# Altium PCB AccBottom.PcbDoc
Units mil, origin at the board's own origin, x right, y up, seen from the top; angles counter-clockwise.
Board outline 12801.24 x 5462.41 mil, 2 copper layers (Top Layer, Bottom Layer), stack 42.17 mil thick; 35 components, 30 nets, 122 pads, 29 vias.
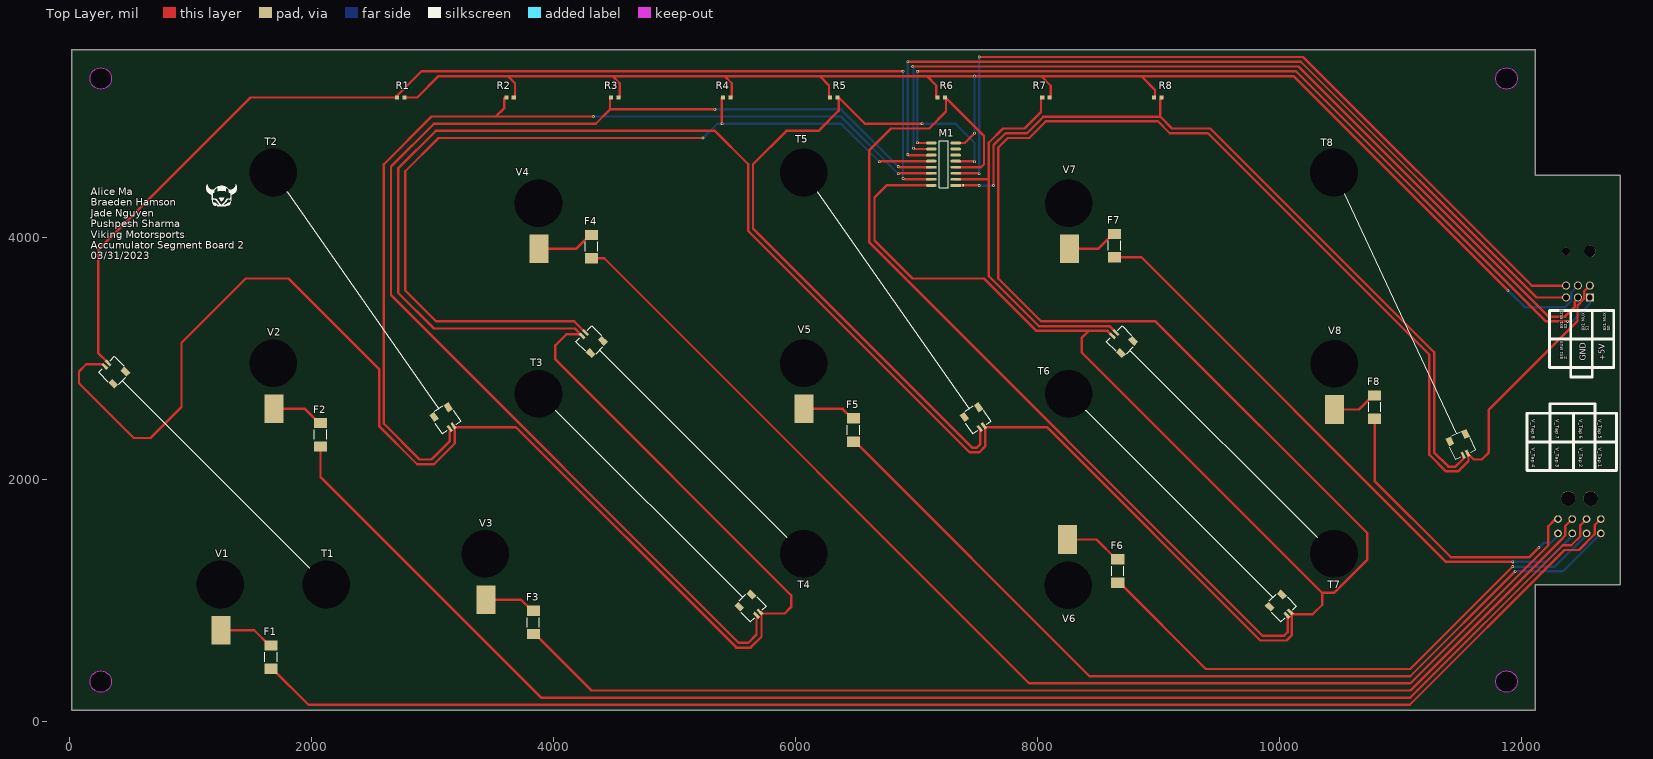
[diagram p0: Top Layer view]
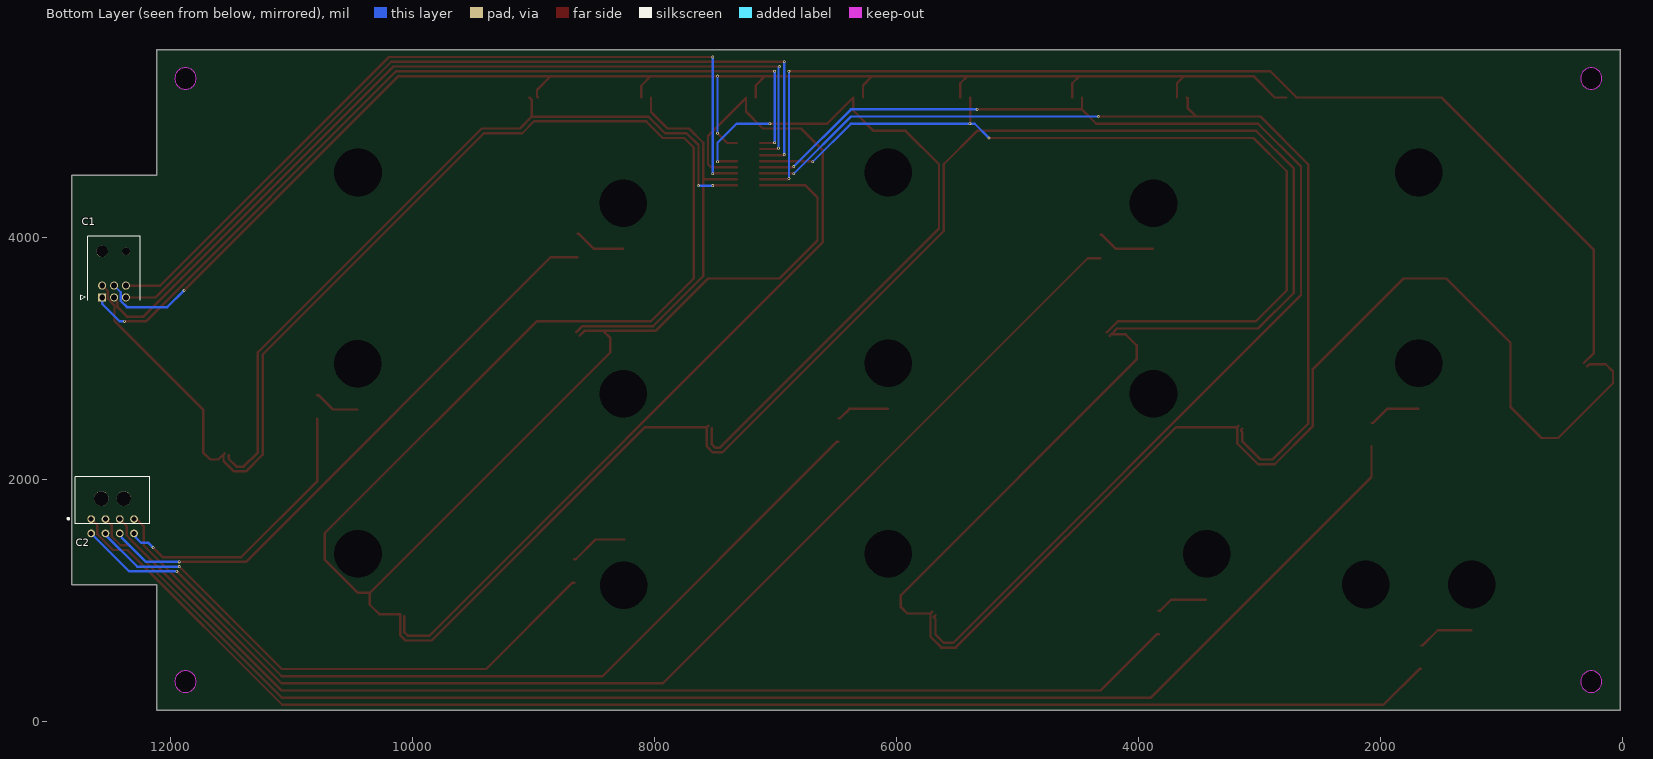
[diagram p1: Bottom Layer view, seen from below]
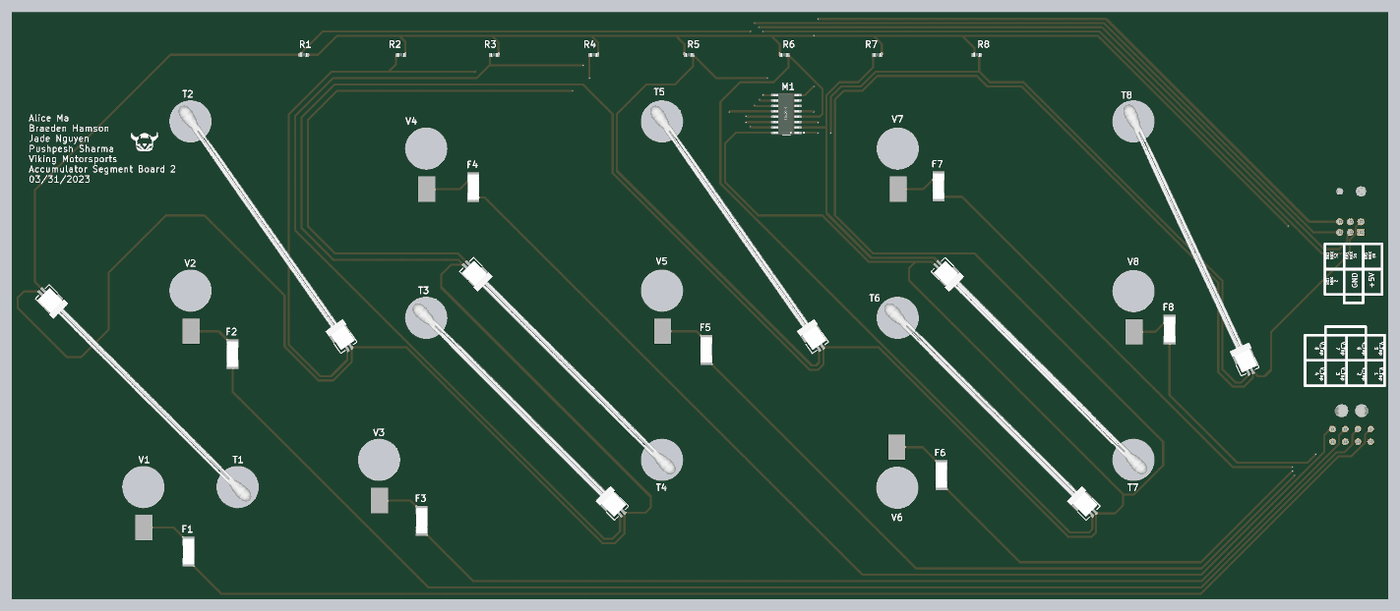
[diagram p2: 3D render of the assembled board from above, using the file's embedded part models]

## Layer stack, top to bottom
Top Solder: solder mask 0.4, Solder Resist, Dk 3.5
Top Layer: signal copper 1.4
Dielectric 1: dielectric 39.3701, FR-4, Dk 4.8
Bottom Layer: signal copper 1.4
Bottom Solder: solder mask 0.4, Solder Resist, Dk 3.5

## Board outline
12116.22,4515.75 12818.9,4515.75 12818.9,1129.92 12116.22,1129.92 12116.22,90.55 17.92,90.55 17.88,1043.31 17.66,1043.31 17.66,4507.87 17.71,4507.87 17.66,5552.69 17.93,5552.96 12115.96,5552.96 12116.22,5552.69
cut-out: 11878.24,5226.24 cw(c11878.24,5314.74) 11789.74,5314.74 cw(c11878.24,5314.74) 11878.24,5403.24 cw(c11878.24,5314.74) 11966.74,5314.74 cw(c11878.24,5314.74)
cut-out: 11878.24,241.12 cw(c11878.24,329.62) 11789.74,329.62 cw(c11878.24,329.62) 11878.24,418.12 cw(c11878.24,329.62) 11966.74,329.62 cw(c11878.24,329.62)
cut-out: 257.85,241.12 cw(c257.85,329.62) 169.35,329.62 cw(c257.85,329.62) 257.85,418.12 cw(c257.85,329.62) 346.35,329.62 cw(c257.85,329.62)
cut-out: 257.85,5226.24 cw(c257.85,5314.74) 169.35,5314.74 cw(c257.85,5314.74) 257.85,5403.24 cw(c257.85,5314.74) 346.35,5314.74 cw(c257.85,5314.74)

## Design rules (kind name [scope] priority, off if disabled: settings)
Clearance [All] p1: gap=0.32 ignorepadtopadclearanceinfootprint=FALSE
PolygonConnect [All] p1: connectstyle=Relief reliefconductorwidth=10 reliefentries=4 polygonreliefangle="90 Angle" airgapwidth=10
RoutingVias [All] p1: holewidth=11.81 width=23.62 viastyle="Through Hole" minholewidth=11.81 minwidth=23.62 maxholewidth=11.81 maxwidth=23.62
SolderMaskExpansion [All] p1: expansion=4 istentingtop=FALSE
Width [All] p1: maxlimit=30 minlimit=10 preferedwidth=19.68
30 further rules are at their usual default settings.

## Components (designator, comment, footprint, x,y, rotation, side; value= is the part's Value field where it differs from the comment)
C1 "1053141106" "6 Pin Dual Nano" 12566.93,3504.72 r0 bottom
C2 "0430450800" "8 Pin Dual" 12480.32,1842.52 r0 bottom
F1 "0ACG-1000-TE" Fuse 1665.35,531.5 r90 top
F2 "0ACG-1000-TE" Fuse 2074.8,2370.08 r90 top
F3 "0ACG-1000-TE" Fuse 3834.65,818.9 r90 top
F4 "0ACG-1000-TE" Fuse 4314.96,3925.2 r90 top
F5 "0ACG-1000-TE" Fuse 6480.31,2409.45 r90 top
F6 "0ACG-1000-TE" Fuse 8665.35,1244.09 r90 top
F7 "0ACG-1000-TE" Fuse 8637.8,3933.07 r90 top
F8 "0ACG-1000-TE" Fuse 10787.4,2598.43 r90 top
M1 "74HC4051D,653" 8x1MUX 7224.41,4606.3 r180 top
R1 "RC0805FR-133K3L" 3.3kRes 2737.22,5157.48 r0 top value=3.3kR
R2 "RC0805FR-133K3L" 3.3kRes 3641.73,5157.48 r0 top value=3.3kR
R3 "RC0805FR-133K3L" 3.3kRes 4507.87,5157.48 r0 top value=3.3kR
R4 "RC0805FR-133K3L" 3.3kRes 5433.07,5157.48 r0 top value=3.3kR
R5 "RC0805FR-133K3L" 3.3kRes 6317.89,5157.48 r180 top value=3.3kR
R6 "RC0805FR-133K3L" 3.3kRes 7204.72,5157.48 r180 top value=3.3kR
R7 "RC0805FR-133K3L" 3.3kRes 8070.87,5157.48 r0 top value=3.3kR
R8 "RC0805FR-133K3L" 3.3kRes 8996.06,5157.48 r180 top value=3.3kR
T1 "Thermistor" Thermistor 320.01,2962.69 r45 top
T2 "Thermistor" Thermistor 3141.52,2421.46 r215 top
T3 "Thermistor" Thermistor 5678.68,877.72 r225 top
T4 "Thermistor" Thermistor 4265.48,3215.8 r45 top
T5 "Thermistor" Thermistor 7525.38,2421.46 r215 top
T6 "Thermistor" Thermistor 10062.54,877.72 r225 top
T7 "Thermistor" Thermistor 8649.34,3215.8 r45 top
T8 "Thermistor" Thermistor 11519.73,2200.54 r205 top
V1 "V_Tap" "Voltage tap" 1245.8,1132.29 r0 top
V2 "V_Tap" "Voltage tap" 1684.19,2961.23 r0 top
V3 "V_Tap" "Voltage tap" 3437.73,1385.39 r0 top
V4 "V_Tap" "Voltage tap" 3876.12,4283.96 r0 top
V5 "V_Tap" "Voltage tap" 6068.05,2961.23 r0 top
V6 "V_Tap" "Voltage tap" 8255.91,1125.98 r180 top
V7 "V_Tap" "Voltage tap" 8259.97,4283.96 r0 top
V8 "V_Tap" "Voltage tap" 10452.76,2956.69 r0 top

## Footprints (in the part's own frame and the unit in brackets; to place one, negate y for a bottom-side part, rotate by r counter-clockwise, add the part's x,y. Pads: shape width x height; smd on the part's side, far side on the other; paste and mask are expansions set on the pad)
3.3kRes [mm]
  rect 0.87x0.93 smd: 1(-0.78,0) 2(0.78,0)
  body extent -0.8,-0.4 0.8,0.4, height 0.55
"6 Pin Dual Nano" [mm]
  rect 1.7x1.7 / inner round 1.7 / far side rect 1.7x1.7 hole 1.2 mask+0.076: 1(0,0)
  round 1.7 hole 1.2 mask+0.076: 2(-2.5,0) 3(-5,0) 4(0,-2.5) 5(-2.5,-2.5) 6(-5,-2.5)
  round 1.6 hole 1.6 unplated mask+0.076: 7(-5,-9.68)
  round 2.37 hole 2.37 unplated mask+0.076: 8(0,-9.68)
  silkscreen extent -7.97,-12.89 4.5,0.59, body extent -6.55,-14.34 1.89,0.32, height 9.23
"8 Pin Dual" [mm]
  round 1.62 hole 1.07: 1(4.5,4.32) 2(1.5,4.32) 3(-1.5,4.32) 4(-4.5,4.32) 5(4.5,7.32) 6(1.5,7.32) 7(-1.5,7.32) 8(-4.5,7.32)
  round 3.05 hole 3.05 unplated: 9(-2.35,0) 10(2.35,0)
  silkscreen extent -7.83,-4.6 9.47,5.31, body extent -8.08,-4.56 8.08,7.68, height 8.74
8x1MUX [mil]
  rect 86.79x23.94 smd paste+0 mask+0: 1(-100.43,175)
  rrect100% 86.79x23.94 smd paste+0 mask+0: 2(-100.43,125) 3(-100.43,75) 4(-100.43,25) 5(-100.43,-25) 6(-100.43,-75) 7(-100.43,-125) 8(-100.43,-175) 9(100.43,-175) 10(100.43,-125) 11(100.43,-75) 12(100.43,-25) 13(100.43,25) 14(100.43,75) 15(100.43,125) 16(100.43,175)
  silkscreen extent -168,-195 37,195, body extent -164,-215 164,215, height 10
Fuse [mm]
  rect 2.15x2.8 smd: 1(-2.455,0) 2(2.455,0)
  silkscreen extent -1,-1.27 1,1.27, body extent -3.05,-1.39 3.05,1.4, height 2.55
Thermistor [mm]
  rect 0.6x1.55 smd: 1(-1,0) 2(0,0)
  rect 1.2x1.8 smd: ""(-2.325,-3.825) ""(1.3,-3.825)
  oval 0.6x1.2 hole 10 unplated: ""(-0.5,-65.25)
  silkscreen extent -2.8,-60.32 1.9,0.08, body extent -3.12,-69.41 1.88,0.18, height 1.24
"Voltage tap" [mm]
  rect 4x6 smd: 1(0.125,-9.6)
  round 3 hole 10 unplated: ""(0,0)

## Part data
C1: "Nano-Fit Right-Angle Header, Through Hole, 2.50mm Pitch, Dual Row, 6 Circuits, Glow-Wire Capable, Tray", Manufacturer_Name=Molex, Arrow Part Number=1053141106, Arrow Price/Stock=https://www.arrow.com/en/products/1053141106/molex?region=europe, Datasheet Link=https://www.molex.com/pdm_docs/sd/1053141104_sd.pdf, Geometry.Height=9.14mm, Manufacturer_Part_Number=1053141106
C2: "Micro-Fit (3.0) dual row, right angle, thru hole header", Manufacturer_Name=Molex, Mouser Part Number=N/A, Arrow Part Number=0430450800, Arrow Price/Stock=https://www.arrow.com/en/products/0430450800/molex, Datasheet Link=http://www.molex.com/pdm_docs/sd/430450800_sd.pdf, Manufacturer_Part_Number=0430450800, Mouser Price/Stock=https://www.mouser.co.uk/ProductDetail/Molex/0430450800?qs=PBcRNPEHKsoGHBzIT0cB6w%3D%3D
F1 F2 F3 F4 F5 F6 F7 F8: "Electric Fuse, 1A, 350VAC, 500VDC, 100A (IR), Surface Mount", Manufacturer=Bel, Supplier Part Number=71AJ7068, Category=Fuses, Manufacturer Part Number=0ACG-1000-TE, Pricing="1=3.46000, 10=3.34000, 25=2.98000, 50=2.62000, 100=2.14000, 250=2.08000 (USD)", RoHS=Yes, Stock=965, Supplier=Newark
M1: library part 74HC4051D, "IC MUX/DEMUX 8X1 16SOIC"
R1 R2 R3 R4 R5 R6 R7 R8: "Fixed Resistor, Metal Glaze/thick Film, 0.125W, 3300ohm, 150V, 1% +/-Tol, 100ppm/Cel, Surface Mount, 0805", Case Code (Imperial)=0805, Case Code (Metric)=2012, Manufacturer="KOA Speer", Manufacturer Part Number=RK73G2ATTD3301F, Max Operating Temperature=125°C, Min Operating Temperature=-55°C, Package Height=0.5mm, Package Length=2mm, Package Shape=Rectangular, Package Style=SMTMeter, Package Width=1.25mm, Power=125mW, Rated Temperature=70°C, Resistance=3.3kR, Resistor Type="Thick Film", Supplier Part Number 1=3067720, Temperature Coefficient=50ppm/°C, Tolerance=1%, Voltage Rating=150V, Additional Feature="HIGH PRECISION", Case/Package=0805, Category="Chip SMD Resistors", ComponentLink1Description=https://datasheet.ciiva.com:443/pdfs/VipMasterIC/IC/KOAS/KOAS-S-A0009827357/KOAS-S-A0009827357-1.pdf?src-supplier=IHS+Markit, ComponentLink1URL=https://datasheet.ciiva.com:443/pdfs/VipMasterIC/IC/KOAS/KOAS-S-A0009827357/KOAS-S-A0009827357-1.pdf?src-supplier=IHS+Markit, ComponentLink2Description=https://datasheet.ciiva.com/5554/rk73g-5554844.pdf?src-supplier=Mouser, ComponentLink2URL=https://datasheet.ciiva.com/5554/rk73g-5554844.pdf?src-supplier=Mouser, ComponentLink3Description=https://datasheet.ciiva.com:443/pdfs/VipMasterIC/IC/YAGO/YAGO-S-A0008145938/YAGO-S-A0008145938-1.pdf?src-supplier=IHS+Markit, ComponentLink3URL=https://datasheet.ciiva.com:443/pdfs/VipMasterIC/IC/YAGO/YAGO-S-A0008145938/YAGO-S-A0008145938-1.pdf?src-supplier=IHS+Markit, ComponentLink4Description=http://www.mouser.com/ds/2/447/Yageo_08112016_RC0805-968729.pdf?src-supplier=Mouser, ComponentLink4URL=http://www.mouser.com/ds/2/447/Yageo_08112016_RC0805-968729.pdf?src-supplier=Mouser, ComponentLink5Description=http://www.yageo.com/pdf/PYu-RC0805_51_RoHS_L_4.pdf?src-supplier=Avnet, ComponentLink5URL=http://www.yageo.com/pdf/PYu-RC0805_51_RoHS_L_4.pdf?src-supplier=Avnet, Construction=Rectangular, Depth=1.25mm, JESD-609 Code=e3, Length=2mm, Military Standard=Not, Mounting Technology="Surface Mount", Packaging="Tape and Reel", Pins=2, Power Rating=125mW, Pricing="1=0.2602, 10=0.219, 25=0.2168, 100=0.0859, 250=0.0829, 500=0.0771, 1000=0.0463, 3000=0.0331 (USD)", Reach SVHC Compliant=Yes, Reference Standard=AEC-Q200, RoHS=Yes, RoHS Compliant=Yes, Series=RK73G, Stock=4469, Supplier="Arrow Electronics", Supplier 1="Future Electronics", Supplier Part Number=RK73G2ATTD3301F, Technology="THICK FILM/METAL GLAZE", Terminal Finish=Nickel, Termination=SMD/SMT, Working Voltage=150V

## Via types
v1: diameter 23.62, hole 11.81, Top Layer to Bottom Layer, tented both sides, 29 vias

## Nets (pads, with @x,y where several pads share a name; then routed paths per layer and width w, separated by ;. In a path a pad name is that pad's centre, name@x,y a point inside that pad or via, vN(x,y) a via of type N, cw(c..) or ccw(c..) an arc to the next point about the centre after c; other vN are vias at no path point)
"+ 5V": C1.4 M1.16 T1.1 T2.1 T3.1 T4.1 T5.1 T6.1 T7.1 T8.1 | length 45375.2
  Top Layer w19.68: T1.1 278.94,2948.08 276.16,2948.08 271.48,2952.76 137.8,2952.76 78.74,2893.7 78.74,2795.28 531.5,2342.52 669.29,2342.52 925.2,2598.43 925.2,3129.92 1456.69,3661.42 1811.02,3661.42 2559.06,2913.39 2559.06,2440.95 2874.02,2125.98 3011.81,2125.98 3184.5,2298.67 T2.1@3184.5,2433.31 ; T2.1 T2.1@3184.5,2433.31 ; T4.1 T4.1@4224.42,3201.18 ; T3.1 T3.1@5719.74,892.34 ; M1.16@7125.95,4431.3 M1.16 6754.13,4431.3 6653.54,4330.71 6653.54,3976.38 6968.5,3661.42 7559.06,3661.42 7992.13,3228.35 8425.2,3228.35 ; T5.1 T5.1@7568.36,2433.31 ; T7.1 8581.11,3228.35 8425.2,3228.35 ; T6.1@10103.6,885.83 10103.6,713.84 10059.06,669.29 9842.52,669.29 8078.5,2433.31 T5.1@7568.36,2433.31 ; T6.1@10112.9,885.83 10275.59,885.83 10354.33,964.57 10354.33,1062.99 ; T8.1 11555.41,2212.35 T8.1@11563.31,2204.44 ; C1.4@12577.72,3613.94 12519.69,3555.91 12519.69,3494.21 12464.88,3439.41 12464.88,3311.34 11732.28,2578.74 11732.28,2224.41 11673.23,2165.35 11607.23,2165.35 11573.99,2198.59 11569.16,2198.59 T8.1@11563.31,2204.44 ; T2.1@3184.5,2433.31 3688.73,2433.31 5511.81,610.24 5629.92,610.24 5719.74,700.06 T3.1@5719.74,892.34 ; T4.1@4224.42,3201.18 4177.57,3248.03 3011.81,3248.03 2716.54,3543.31 2716.54,4570.54 3027.89,4881.89 5334.65,4881.89 5610.24,4606.3 5610.24,4055.12 7440.95,2224.41 7519.69,2224.41 7568.36,2273.08 T5.1@7568.36,2433.31 ; T4.1@4224.42,3201.18 4106.69,3201.18 4015.75,3110.24 4015.75,2992.13 5964.57,1043.31 5964.57,944.88 5912.02,892.34 T3.1@5719.74,892.34 ; 8425.2,3228.35 8366.14,3169.29 8366.14,3051.18 10354.33,1062.99 ; 10354.33,1062.99 10452.76,1062.99 10728.35,1338.58 10728.35,1555.12 8976.38,3307.09 8031.5,3307.09 7677.17,3661.42 7677.17,4744.09 7755.91,4822.83 7933.07,4822.83 8070.87,4960.63 8996.06,4960.63 9094.49,4862.2 9409.45,4862.2 11240.16,3031.5 11240.16,2204.72 11377.95,2066.93 11476.38,2066.93 11563.31,2153.86 T8.1@11563.31,2204.44
GND: C1.5 M1.8 R1.2 R2.2 R3.2 R4.2 R5.2 R6.2 R7.2 R8.2 | length 12820.9
  Top Layer w19.68: R1.2@2777.6,5157.48 2874.02,5157.48 3051.18,5334.65 3622.05,5334.65 ; R2.2@3682.11,5157.48 3682.11,5274.59 3622.05,5334.65 ; R3.2@4548.25,5157.48 4548.25,5274.59 4488.19,5334.65 ; R4.2@5473.44,5157.48 5473.44,5274.59 5413.39,5334.65 ; R5.2@6277.52,5157.48 6277.52,5257.91 6200.79,5334.65 ; R6.2@7164.35,5157.48 7164.35,5256.91 7086.61,5334.65 ; M1.8@7322.87,4781.3 M1.8 7399.41,4781.3 v1(7480.31,4862.2) ; R7.2@8111.24,5157.48 8111.24,5254.9 8031.5,5334.65 ; R8.2 8972.64,5164.76 8972.64,5220.28 8858.27,5334.65 ; v1(11889.76,3562.99) 10118.11,5334.65 8858.27,5334.65 ; 3622.05,5334.65 4488.19,5334.65 ; 4488.19,5334.65 5413.39,5334.65 ; 5413.39,5334.65 6200.79,5334.65 ; 6200.79,5334.65 7086.61,5334.65 ; 7086.61,5334.65 v1(7480.31,5334.65) 8031.5,5334.65 ; 8031.5,5334.65 8858.27,5334.65
  Bottom Layer w19.68: v1(7480.31,4862.2) v1(7480.31,5334.65) ; v1(11889.76,3562.99) 11890.83,3562.99 12028.62,3425.2 12362.2,3425.2 12413.7,3476.69 12413.7,3548.35 C1.5@12485.79,3620.43
NetC1_1: C1.1 M1.9 | length 7233.1
  Top Layer w19.68: v1(7007.87,4783.46) 7008.94,4783.46 7011.1,4781.3 M1.9@7125.95,4781.3 ; v1(7007.87,5374.02) 10137.8,5374.02 12204.72,3307.09 v1(12381.89,3307.09)
  Bottom Layer w19.68: v1(7007.87,4783.46) v1(7007.87,5374.02) ; v1(12381.89,3307.09) 12421.26,3307.09 12566.93,3452.76 12566.93,3481.1 12578.74,3492.91 C1.1@12578.74,3495.88
NetC1_2: C1.2 M1.10 | length 7283.6
  Top Layer w19.68: v1(6968.5,5413.39) 10157.48,5413.39 12224.41,3346.46 12362.2,3346.46 12440.94,3425.2 12440.94,3469.57 12468.5,3497.13 C1.2 ; v1(6975.97,4737.7) 6977.03,4737.7 6983.43,4731.3 M1.10 M1.10@7125.95,4731.3
  Bottom Layer w19.68: v1(6968.5,5413.39) 6968.5,5412.32 6975.97,5404.86 v1(6975.97,4737.7)
NetC1_3: C1.3 M1.11 | length 7214.3
  Top Layer w19.68: v1(6929.13,4685.04) 6930.2,4685.04 6933.94,4681.3 M1.11 M1.11@7125.95,4681.3 ; v1(6929.13,5452.76) 10177.17,5452.76 12125.98,3503.94 C1.3@12370.08,3503.94
  Bottom Layer w19.68: v1(6929.13,4685.04) v1(6929.13,5452.76)
NetC1_6: C1.6 M1.3 | length 6796.1
  Top Layer w19.68: M1.3@7322.87,4531.3 M1.3 7514.88,4531.3 7518.62,4527.56 v1(7519.69,4527.56) ; v1(7519.69,5492.13) 10196.85,5492.13 12086.61,3602.36 C1.6@12370.08,3602.36
  Bottom Layer w19.68: v1(7519.69,4527.56) v1(7519.69,5492.13)
NetC2_1: C2.1 F1.1 | length 11805
  Top Layer w19.68: F1.1 1678.15,434.84 1975.2,137.8 11078.74,137.8 12358.27,1417.32 12476.38,1417.32 12606.3,1547.24 12606.3,1621.26 C2.1@12665.09,1680.05
NetC2_2: C2.2 F2.1 | length 12137.1
  Top Layer w19.68: F2.1 2074.8,2019.69 3897.64,196.85 11082.68,196.85 12342.52,1456.69 12413.39,1456.69 12488.19,1531.5 12488.19,1621.26 C2.2
NetC2_3: C2.3 F3.1 | length 9412.9
  Top Layer w19.68: F3.1 3847.44,722.24 4313.78,255.91 11083.87,255.91 12322.83,1494.87 12322.83,1496.06 12363.71,1536.94 12363.71,1614.89 C2.3
NetC2_4: C2.4 F4.1 | length 10098.1
  Top Layer w19.68: F4.1 4419.49,3828.54 7933.07,314.96 11082.68,314.96 12224.41,1456.69 12224.41,1614.17 12274.24,1664 12294.71,1664 C2.4
NetC2_5: C2.5 F5.1 | length 7469.1
  Top Layer w19.68: F5.1 6493.11,2312.8 8431.89,374.02 11082.68,374.02 v1(11948.82,1240.16)
  Bottom Layer w19.68: v1(11948.82,1240.16) 12343.31,1240.16 C2.5
NetC2_6: C2.6 F6.1 | length 4641.3
  Top Layer w19.68: F6.1 8678.15,1147.44 9392.52,433.07 11082.68,433.07 v1(11929.13,1279.53)
  Bottom Layer w19.68: v1(11929.13,1279.53) 12276.5,1279.53 12539.37,1542.4 C2.6
NetC2_7: C2.7 F7.1 | length 4934.8
  Top Layer w19.68: F7.1 8860.43,3836.42 11377.95,1318.9 v1(11929.13,1318.9)
  Bottom Layer w19.68: v1(11929.13,1318.9) 12204.72,1318.9 12406.97,1521.14 12406.97,1528.1 12421.26,1542.4 C2.7
NetC2_8: C2.8 F8.1 | length 2382.5
  Top Layer w19.68: F8.1 10787.4,1988.19 11417.32,1358.27 12066.93,1358.27 v1(12145.67,1437.01)
  Bottom Layer w19.68: v1@12145.67,1437.07 12184.97,1476.38 12244.09,1476.38 12288.85,1521.14 12288.85,1528.1 12303.15,1542.4 C2.8
NetF1_2: F1.2 V1.1 | length 466.9
  Top Layer w19.68: V1.1 1526.37,754.34 1652.56,628.15 F1.2
NetF2_2: F2.2 V2.1 | length 434
  Top Layer w19.68: V2.1 1945.46,2583.28 2062.01,2466.73 F2.2
NetF3_2: F3.2 V3.1 | length 430.1
  Top Layer w19.68: V3.1 3729.96,1007.44 3821.85,915.55 F3.2
NetF4_2: F4.2 V4.1 | length 481.9
  Top Layer w19.68: V4.1 4186.33,3906.01 4302.17,4021.85 F4.2
NetF5_2: F5.2 V5.1 | length 439.3
  Top Layer w19.68: V5.1 6390.35,2583.28 6467.52,2506.1 F5.2
NetF6_2: F6.2 V6.1 | length 482
  Top Layer w19.68: V6.1 8489.37,1503.94 8652.56,1340.75 F6.2
NetF7_2: F7.2 V7.1 | length 424.1
  Top Layer w19.68: V7.1 8501.29,3906.01 8625,4029.72 F7.2
NetF8_2: F8.2 V8.1 | length 377.9
  Top Layer w19.68: V8.1 10658.27,2578.74 10774.61,2695.08 F8.2
T1_Out: M1.15 R1.1 T1.2 | length 9362
  Top Layer w19.68: T1.2 236.22,3046.48 236.22,3897.64 1496.06,5157.48 2696.85,5157.48 2696.85,5161.55 2909.31,5374.02 v1(6889.76,5374.02) ; v1(6889.76,4488.19) 6890.83,4488.19 6897.72,4481.3 M1.15@7125.95,4481.3
  Bottom Layer w19.68: v1(6889.76,4488.19) v1(6889.76,5374.02)
T2_Out: M1.14 R2.1 T2.2 | length 8065.8
  Top Layer w19.68: T2.2 3152.25,2410.73 3152.25,2400.71 3141.52,2389.98 3141.52,2314.75 2992.44,2165.67 2893.39,2165.67 2598.43,2460.63 2598.43,4606.3 2992.13,5000 3523.62,5000 ; R2.1@3601.36,5157.48 3594.95,5151.08 3594.95,5071.33 3523.62,5000 ; v1(4330.71,5000) 3523.62,5000 ; v1(6850.39,4527.56) 6851.46,4527.56 6855.2,4531.3 M1.14@7125.95,4531.3
  Bottom Layer w19.68: v1(4330.71,5000) 6377.95,5000 v1(6850.39,4527.56)
T3_Out: M1.13 R3.1 T3.2 | length 10434.1
  Top Layer w19.68: R3.1@4467.5,5157.48 4467.5,5059.06 ; v1(5334.65,5059.06) 4467.5,5059.06 ; T3.2 5691.91,864.5 5691.91,861.72 5678.68,848.49 5678.68,718.05 5610.24,649.61 5531.5,649.61 2657.48,3523.62 2657.48,4586.61 3011.81,4940.94 4349.39,4940.94 4467.5,5059.06 ; v1(6850.39,4586.61) 6851.46,4586.61 6856.77,4581.3 M1.13@7125.95,4581.3
  Bottom Layer w19.68: v1(5334.65,5059.06) 6377.95,5059.06 v1(6850.39,4586.61)
T4_Out: M1.12 R4.1 T4.2 | length 7481
  Top Layer w19.68: T4.2 4262.7,3215.8 4171.4,3307.09 3031.5,3307.09 2775.59,3562.99 2775.59,4547.24 3051.18,4822.83 v1(5236.22,4822.83) ; R4.1@5392.7,5157.48 5392.7,4941.95 v1(5393.7,4940.94) ; v1(6692.91,4625.98) 6693.98,4625.98 6699.29,4631.3 M1.12@7125.95,4631.3
  Bottom Layer w19.68: v1(5236.22,4822.83) 5354.33,4940.94 v1(5393.7,4940.94) 6377.95,4940.94 v1(6692.91,4625.98)
T5_Out: M1.5 R5.1 T5.2 | length 5898.1
  Top Layer w19.68: v1(7047.24,4940.94) 6574.8,4940.94 6358.27,5157.48 6358.27,5049.19 6190.97,4881.89 5925.2,4881.89 5649.61,4606.3 5649.61,4074.8 7460.63,2263.78 7500,2263.78 7529.08,2292.85 T5.2@7529.08,2423.29 ; M1.5@7322.87,4631.3 7473.93,4631.3 7479.25,4625.98 v1(7480.31,4625.98)
  Bottom Layer w19.68: v1(7047.24,4940.94) 7322.83,4940.94 7480.31,4783.46 v1(7480.31,4625.98)
T6_Out: M1.4 R6.1 T6.2 | length 7514.3
  Top Layer w19.68: R6.1@7245.1,5157.48 R6.1@7245.1,5153.41 ; M1.4@7322.87,4581.3 7534.06,4581.3 7559.06,4606.3 7559.06,4839.45 R6.1@7245.1,5153.41 ; T6.2@10068.45,868.18 10068.45,737.74 10039.37,708.66 9862.21,708.66 6611.89,3958.98 6611.89,4722.13 6791.34,4901.57 7106.3,4901.57 7245.1,5040.37 R6.1@7245.1,5153.41
T7_Out: M1.2 R7.1 T7.2 | length 3281.2
  Top Layer w19.68: M1.2@7322.87,4481.3 7591.54,4481.3 7598.43,4488.19 ; R7.1@8030.49,5157.48 8030.49,5038.37 7893.7,4901.57 7716.54,4901.57 7598.43,4783.46 7598.43,4488.19 ; T7.2 8597.42,3267.72 8011.81,3267.72 7598.43,3681.1 7598.43,4488.19
T8_Out: M1.1 R8.1 T8.2 | length 6535.9
  Top Layer w19.68: M1.1@7322.87,4431.3 M1.1 7516.45,4431.3 7518.62,4429.13 v1(7519.69,4429.13) ; v1(7637.8,4429.13) 7637.8,4763.78 7736.22,4862.2 7913.39,4862.2 8050.18,4999 9016.75,4999 ; R8.1@9035.43,5157.48 9016.75,5138.8 9016.75,4999 ; T8.2 11519.73,2169.33 11456.69,2106.3 11397.64,2106.3 11279.53,2224.41 11279.53,3051.18 9429.13,4901.57 9114.17,4901.57 9016.75,4999
  Bottom Layer w19.68: v1(7519.69,4429.13) v1(7637.8,4429.13)
pads on no net: C1.7 C1.8 C2.9 C2.10 M1.6 M1.7 T1. T2. T3. T4. T5. T6. T7. T8. V1. V2. V3. V4. V5. V6. V7. V8.

## Silkscreen, mask and mechanical layers (free items; w line width, h text height)
Top Overlay:
  drawing of 23 lines, arcs and shapes, not listed
  text "Alice Ma / Braeden Hamson / Jade Nguyen / Pushpesh Sharma / Viking Motorsports / Accumulator Segment Board 2 / 03/31/2023" at 177.17,3818.9 h59.06
  text "8X1 MUX / S2" at 12381.89,3248.03 h23.62 r90
  text "8X1 MUX / S1" at 12559.06,3228.35 h23.62 r90
  text "8X1 MUX / S0" at 12736.22,3228.35 h23.62 r90
  text "8X1 MUX / Z" at 12381.89,2992.13 h23.62 r90
  text "GND" at 12531.5,2980.32 h47.24 r90
  text "+5V" at 12688.98,2980.32 h47.24 r90
  text "V_Tap 8" at 12086.61,2499.11 h30 r270
  text "V_Tap 7" at 12283.46,2499.11 h30 r270
  text "V_Tap 6" at 12480.32,2499.11 h30 r270
  text "V_Tap 5" at 12637.8,2499.11 h30 r270
  text "V_Tap 4" at 12086.61,2262.89 h30 r270
  text "V_Tap 3" at 12283.46,2262.89 h30 r270
  text "V_Tap 2" at 12480.32,2262.89 h30 r270
  text "V_Tap 1" at 12637.8,2262.89 h30 r270
DXF:
  circle w0.5: c257.85,329.62 r88.5
  circle w0.5: c10451.9,4537.07 r98.43
  circle w0.5: c11878.24,5314.74 r88.5
  circle w0.5: c10451.9,1385.39 r98.43
  circle w0.5: c10451.9,2961.23 r29.53
  circle w0.5: c8259.97,2708.13 r98.43
  circle w0.5: c2122.57,1132.29 r98.43
  circle w0.5: c257.85,5314.74 r88.5
  circle w0.5: c8259.97,4283.96 r29.53
  circle w0.5: c8259.97,1132.29 r29.53
  circle w0.5: c3437.73,1385.39 r29.53
  circle w0.5: c6068.05,1385.39 r98.43
  circle w0.5: c6068.05,4537.07 r98.43
  circle w0.5: c3876.12,4283.96 r29.53
  circle w0.5: c3876.12,2708.13 r98.43
  circle w0.5: c6068.05,2961.23 r29.53
  circle w0.5: c11878.24,329.62 r88.5
  circle w0.5: c1684.19,2961.23 r29.53
  circle w0.5: c1684.19,4537.07 r98.43
  circle w0.5: c1245.8,1132.29 r29.53
  lines w0.5: 19.03,90.8 19.03,5553.56 ; 19.03,90.8 12117.06,90.8 ; 19.03,90.8 12117.06,90.8 ; 19.03,90.8 19.03,1129.19 cw(c19.03,879.19) 269.03,879.19 ccw(c807.42,879.19) 807.42,340.8 11328.68,340.8 ccw(c11328.68,879.19) 11867.06,879.19 cw(c12117.06,879.19) 12117.06,1129.19 12117.06,90.8 ; 19.03,5553.56 12117.06,5553.56 ; 19.03,5553.56 12117.06,5553.56 ; 19.03,5553.56 19.03,4515.17 ccw(c19.03,4765.17) 269.03,4765.17 cw(c807.42,4765.17) 807.42,5303.56 11328.68,5303.56 cw(c11328.68,4765.17) 11867.06,4765.17 ccw(c12117.06,4765.17) 12117.06,4515.17 12117.06,5553.56